# Altium PCB AES17Filter.PcbDoc
Units mm, origin at the board's own origin, x right, y up, seen from the top; angles counter-clockwise.
Board outline 130.75 x 56 mm, 2 copper layers (Top, Bottom), stack 1.53 mm thick; 80 components, 61 nets, 168 pads, 0 vias.
Unrouted connection lines stored in the file: 104.
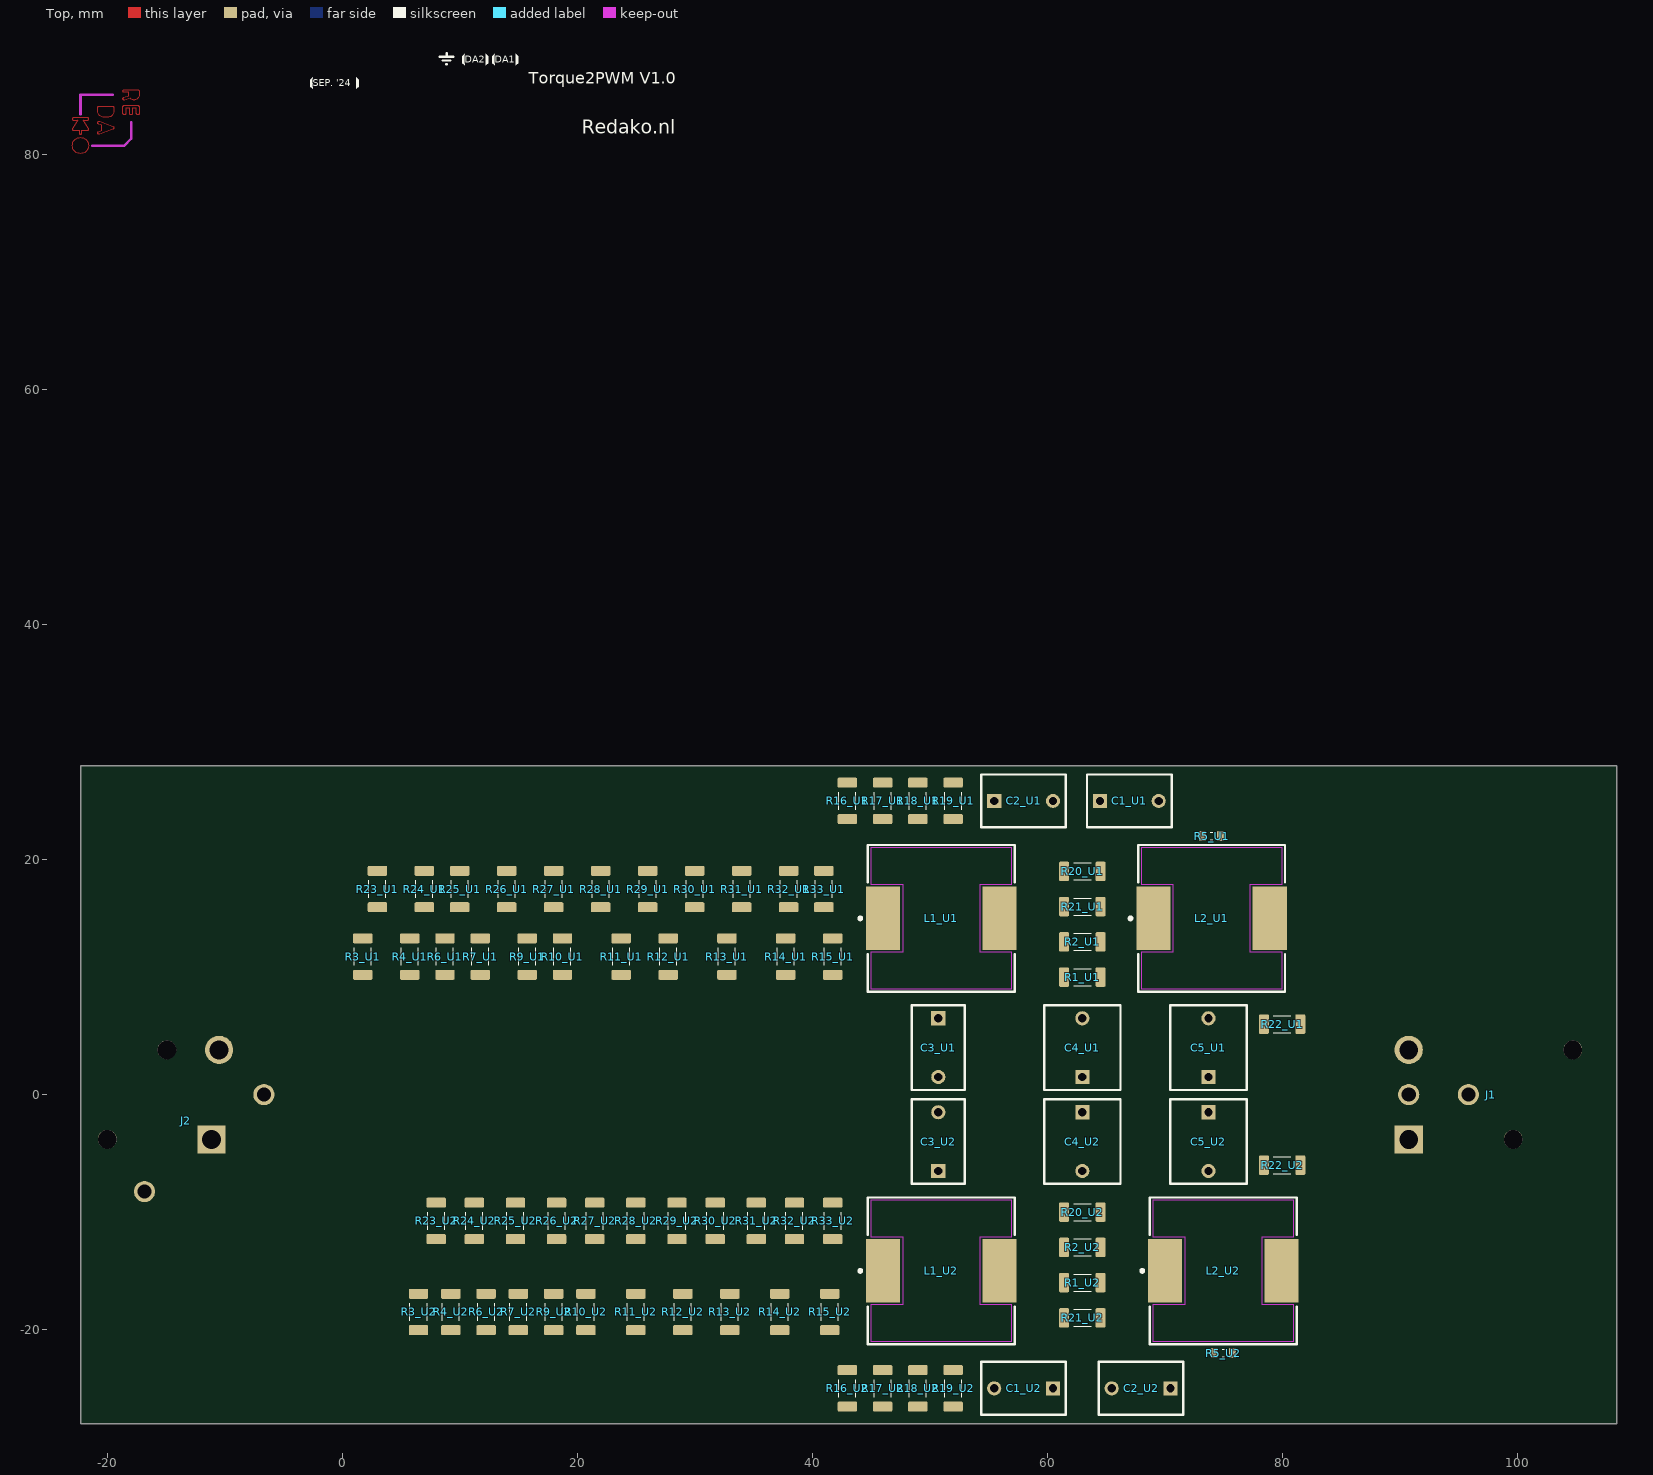
[diagram p0: Top view]
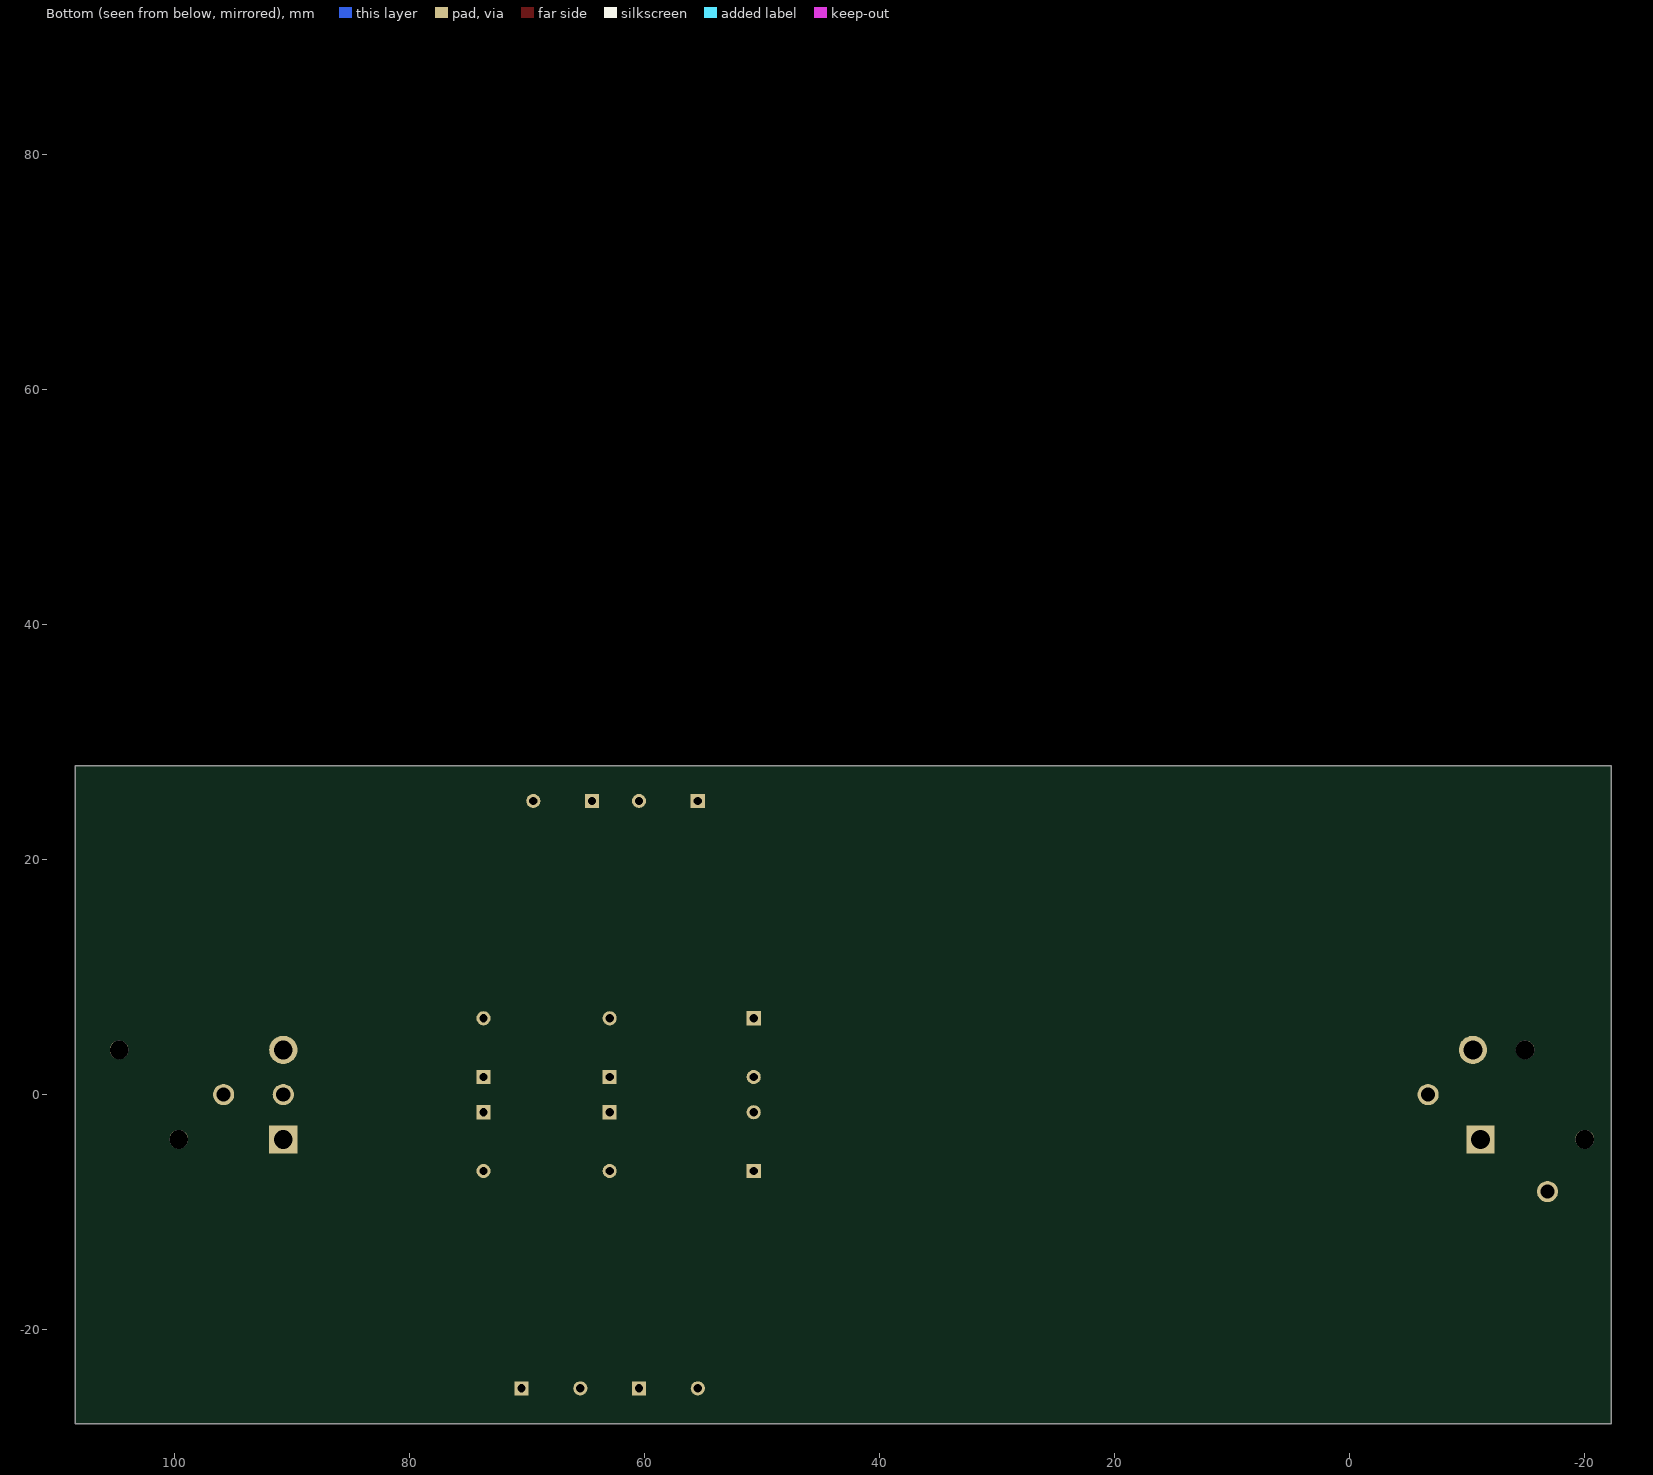
[diagram p1: Bottom view, seen from below]

## Layer stack, top to bottom
Top Solder: solder mask 0.01, Solder Resist, Dk 3.5
Top: signal copper 0.035
Dielectric 1: core 1.46, FR-4, Dk 4.8
Bottom: signal copper 0.035
Bottom Solder: solder mask 0.01, Solder Resist, Dk 3.5

## Board outline
-22.25,-28 108.5,-28 108.5,28 -22.25,28

## Design rules (kind name [scope] priority, off if disabled: settings)
BoardOutlineClearance mdCopperDimension [All] p1: gap=0.25 ignorepadtopadclearanceinfootprint=FALSE
Clearance [All] p1: gap=0.125 ignorepadtopadclearanceinfootprint=FALSE
ComponentClearance [All] p1: gap=0 collisioncheckmode=3 verticalgap=0 showdistances=FALSE
DiffPairsRouting [All] p1: maxlimit=0.127 minlimit=0.125 mostfreqgap=0.127 toplayer_maxgap=0.125 toplayer_prefgap=0.125 toplayer_minwidth=0.399 toplayer_maxwidth=0.399 toplayer_prefwidth=0.399 bottomlayer_mingap=0.127 bottomlayer_minwidth=0.406 bottomlayer_maxwidth=0.406 bottomlayer_prefwidth=0.406 impedanceprofiledriven=TRUE impedanceprofileid={3314250E-EA92-4780-AD0B-8EA7877EF3D0} impedanceprofilevalue=90.000000 maxuncoupledlength=12.7
HoleSize [All] p1: absolutevalues=TRUE maxlimit=2540 minlimit=0.25 maxpercent=80.000 minpercent=20.000
HoleToHoleClearance mdDrill [All] p1: gap=0.203 allowstackedmicrovias=TRUE
MinimumSolderMaskSliver [All] p1 off: minsoldermaskwidth=0.254
PasteMaskExpansion Expansion_SMDPaste_OFF [InPadClass('SMDPaste_OFF')] p1: expansion=0
PasteMaskExpansion mlMinCreamFrame [All] p2: expansion=0
PlaneClearance [All] p1: clearance=0.25
PolygonConnect [All] p1: thpad.connectstyle=Relief thpad.reliefconductorwidth=0.254 thpad.reliefentries=4 thpad.polygonreliefangle="90 Angle" thpad.airgapwidth=0.254 smdpad.connectstyle=Direct smdpad.reliefconductorwidth=0.254 smdpad.reliefentries=4 smdpad.polygonreliefangle="90 Angle" smdpad.airgapwidth=0.254 via.connectstyle=Direct via.reliefconductorwidth=0.254 via.reliefentries=4 via.polygonreliefangle="90 Angle" via.airgapwidth=0.254
RoutingVias [All] p1: holewidth=0.3 width=0.6 viastyle="Through Hole" minholewidth=0.25 minwidth=0.6 maxholewidth=2.54 maxwidth=2.54
SilkToSilkClearance [All] p1: silktosilkclearance=0
SilkToSolderMaskClearance [IsPad] p1: minsilkscreentomaskgap=0 clearancetoexposedcopper=TRUE
SolderMaskExpansion [isVia] p1: expansion=0.102 istentingtop=TRUE
SolderMaskExpansion mlMinStopFrame [All] p2: expansion=0 istentingtop=FALSE
Width "Width_For_NetClass_analog signal" [InNetClass('analog signal')] p1: maxlimit=0.762 minlimit=0.191 preferedwidth=0.508
Width "Width_For_NetClass_digital signal" [InNetClass('digital signal')] p2: maxlimit=0.762 minlimit=0.191 preferedwidth=0.508 minimp=50.000000 maximp=50.000000 favimp=50.000000
Width Width_For_NetClass_power [InNetClass('power')] p3: maxlimit=0.61 minlimit=0.254 preferedwidth=0.3 minimp=50.000000 maximp=50.000000 favimp=50.000000
Width [All] p4: maxlimit=254 minlimit=0.125 preferedwidth=0.2 minimp=50.000000 maximp=50.000000 favimp=50.000000
21 further rules are at their usual default settings.

## Classes and differential pairs
component class AES17Filter: J1 J2
channel class "Single Side Filter": U1 U2
component class U2: C1_U2 C2_U2 C3_U2 C4_U2 C5_U2 L1_U2 L2_U2 R1_U2 R2_U2 R3_U2 R4_U2 R5_U2 R6_U2 R7_U2 R9_U2 R10_U2 R11_U2 R12_U2 R13_U2 R14_U2 R15_U2 R16_U2 R17_U2 R18_U2 R19_U2 R20_U2 R21_U2 R22_U2 R23_U2 R24_U2 R25_U2 R26_U2 R27_U2 R28_U2 R29_U2 R30_U2 R31_U2 R32_U2 R33_U2
component class U1: C1_U1 C2_U1 C3_U1 C4_U1 C5_U1 L1_U1 L2_U1 R1_U1 R2_U1 R3_U1 R4_U1 R5_U1 R6_U1 R7_U1 R9_U1 R10_U1 R11_U1 R12_U1 R13_U1 R14_U1 R15_U1 R16_U1 R17_U1 R18_U1 R19_U1 R20_U1 R21_U1 R22_U1 R23_U1 R24_U1 R25_U1 R26_U1 R27_U1 R28_U1 R29_U1 R30_U1 R31_U1 R32_U1 R33_U1

## Components (designator, comment, footprint, x,y, rotation, side; value= is the part's Value field where it differs from the comment)
C1_U1 "" "Film Capacitor 7.2 x 4.5 x 6.0 mm" 67,25 r0 top value="470pF 250V" (schematic designator C1)
C1_U2 "" "Film Capacitor 7.2 x 4.5 x 6.0 mm" 58,-25 r180 top value="470pF 250V" (schematic designator C1)
C2_U1 "" "Film Capacitor 7.2 x 4.5 x 6.0 mm" 58,25 r0 top value="470pF 250V" (schematic designator C2)
C2_U2 "" "Film Capacitor 7.2 x 4.5 x 6.0 mm" 68,-25 r180 top value="470pF 250V" (schematic designator C2)
C3_U1 "" "Film Capacitor 7.2 x 4.5 x 6.0 mm" 50.738,4 r270 top value="470pF 250V" (schematic designator C3)
C3_U2 "" "Film Capacitor 7.2 x 4.5 x 6.0 mm" 50.738,-4 r90 top value="470pF 250V" (schematic designator C3)
C4_U1 "" "Film Capacitor 7.2 x 6.5 x 8.0 mm" 63,4 r90 top value="4700pF 250V" (schematic designator C4)
C4_U2 "" "Film Capacitor 7.2 x 6.5 x 8.0 mm" 63,-4 r270 top value="4700pF 250V" (schematic designator C4)
C5_U1 "" "Film Capacitor 7.2 x 6.5 x 8.0 mm" 73.738,4 r90 top value="4700pF 250V" (schematic designator C5)
C5_U2 "" "Film Capacitor 7.2 x 6.5 x 8.0 mm" 73.738,-4 r270 top value="4700pF 250V" (schematic designator C5)
J1 "NC3MAAH" NEUTRIK_NC3MAAH 108.56,0 r90 top
J2 "NC3FAAH2" NEUTRIK_NC3FAAH2 -23.81,0 r90 top
L1_U1 "7687709102" "WE-PD HV_1210" 51,15 r270 top (schematic designator L1)
L1_U2 "7687709102" "WE-PD HV_1210" 51,-15 r270 top (schematic designator L1)
L2_U1 "7687709102" "WE-PD HV_1210" 74,15 r270 top (schematic designator L2)
L2_U2 "7687709102" "WE-PD HV_1210" 75,-15 r270 top (schematic designator L2)
R1_U1 "" RESC3216X06N 63,10 r0 top value=300Ω (schematic designator R1)
R1_U2 "" RESC3216X06N 63,-16 r0 top value=300Ω (schematic designator R1)
R2_U1 "" RESC3216X06N 63,13 r0 top value=300Ω (schematic designator R2)
R2_U2 "" RESC3216X06N 63,-13 r0 top value=300Ω (schematic designator R2)
R3_U1 "" RESC3216X06N 1.75,11.75 r90 top value=100Ω (schematic designator R3)
R3_U2 "" RESC3216X06N 6.499,-18.5 r90 top value=100Ω (schematic designator R3)
R4_U1 "" RESC3216X06N 5.75,11.75 r90 top value=100Ω (schematic designator R4)
R4_U2 "" RESC3216X06N 9.249,-18.5 r90 top value=100Ω (schematic designator R4)
R5_U1 "" RESC1608X04N 74,22 r0 top value=3.3kΩ (schematic designator R5)
R5_U2 "" RESC1608X04N 75,-22 r0 top value=3.3kΩ (schematic designator R5)
R6_U1 "" RESC3216X06N 8.75,11.75 r90 top value=100Ω (schematic designator R6)
R6_U2 "" RESC3216X06N 12.249,-18.5 r90 top value=100Ω (schematic designator R6)
R7_U1 "" RESC3216X06N 11.75,11.75 r90 top value=100Ω (schematic designator R7)
R7_U2 "" RESC3216X06N 14.999,-18.5 r90 top value=100Ω (schematic designator R7)
R9_U1 "" RESC3216X06N 15.75,11.75 r90 top value=100Ω (schematic designator R9)
R9_U2 "" RESC3216X06N 17.999,-18.5 r90 top value=100Ω (schematic designator R9)
R10_U1 "" RESC3216X06N 18.75,11.75 r90 top value=100Ω (schematic designator R10)
R10_U2 "" RESC3216X06N 20.749,-18.5 r90 top value=100Ω (schematic designator R10)
R11_U1 "" RESC3216X06N 23.75,11.75 r90 top value=100Ω (schematic designator R11)
R11_U2 "" RESC3216X06N 24.999,-18.5 r90 top value=100Ω (schematic designator R11)
R12_U1 "" RESC3216X06N 27.75,11.75 r90 top value=100Ω (schematic designator R12)
R12_U2 "" RESC3216X06N 28.999,-18.5 r90 top value=100Ω (schematic designator R12)
R13_U1 "" RESC3216X06N 32.75,11.75 r90 top value=100Ω (schematic designator R13)
R13_U2 "" RESC3216X06N 32.999,-18.5 r90 top value=100Ω (schematic designator R13)
R14_U1 "" RESC3216X06N 37.75,11.75 r90 top value=100Ω (schematic designator R14)
R14_U2 "" RESC3216X06N 37.249,-18.5 r90 top value=100Ω (schematic designator R14)
R15_U1 "" RESC3216X06N 41.75,11.75 r90 top value=10Ω (schematic designator R15)
R15_U2 "" RESC3216X06N 41.499,-18.5 r90 top value=10Ω (schematic designator R15)
R16_U1 "" RESC3216X06N 43,25 r90 top value=100Ω (schematic designator R16)
R16_U2 "" RESC3216X06N 43,-25 r90 top value=100Ω (schematic designator R16)
R17_U1 "" RESC3216X06N 46,25 r90 top value=100Ω (schematic designator R17)
R17_U2 "" RESC3216X06N 46,-25 r90 top value=100Ω (schematic designator R17)
R18_U1 "" RESC3216X06N 49,25 r90 top value=100Ω (schematic designator R18)
R18_U2 "" RESC3216X06N 49,-25 r90 top value=100Ω (schematic designator R18)
R19_U1 "" RESC3216X06N 52,25 r90 top value=10Ω (schematic designator R19)
R19_U2 "" RESC3216X06N 52,-25 r90 top value=10Ω (schematic designator R19)
R20_U1 "" RESC3216X06N 63,19 r0 top value=300Ω (schematic designator R20)
R20_U2 "" RESC3216X06N 63,-10 r0 top value=300Ω (schematic designator R20)
R21_U1 "" RESC3216X06N 63,16 r0 top value=300Ω (schematic designator R21)
R21_U2 "" RESC3216X06N 63,-19 r0 top value=300Ω (schematic designator R21)
R22_U1 "" RESC3216X06N 80,6 r0 top value=22Ω (schematic designator R22)
R22_U2 "" RESC3216X06N 80,-6 r0 top value=22Ω (schematic designator R22)
R23_U1 "" RESC3216X06N 3,17.5 r90 top value=100Ω (schematic designator R23)
R23_U2 "" RESC3216X06N 7.999,-10.75 r90 top value=100Ω (schematic designator R23)
R24_U1 "" RESC3216X06N 7,17.5 r90 top value=100Ω (schematic designator R24)
R24_U2 "" RESC3216X06N 11.249,-10.75 r90 top value=100Ω (schematic designator R24)
R25_U1 "" RESC3216X06N 10,17.5 r90 top value=100Ω (schematic designator R25)
R25_U2 "" RESC3216X06N 14.749,-10.75 r90 top value=100Ω (schematic designator R25)
R26_U1 "" RESC3216X06N 14,17.5 r90 top value=100Ω (schematic designator R26)
R26_U2 "" RESC3216X06N 18.249,-10.75 r90 top value=100Ω (schematic designator R26)
R27_U1 "" RESC3216X06N 18,17.5 r90 top value=100Ω (schematic designator R27)
R27_U2 "" RESC3216X06N 21.499,-10.75 r90 top value=100Ω (schematic designator R27)
R28_U1 "" RESC3216X06N 22,17.5 r90 top value=100Ω (schematic designator R28)
R28_U2 "" RESC3216X06N 24.999,-10.75 r90 top value=100Ω (schematic designator R28)
R29_U1 "" RESC3216X06N 26,17.5 r90 top value=100Ω (schematic designator R29)
R29_U2 "" RESC3216X06N 28.499,-10.75 r90 top value=100Ω (schematic designator R29)
R30_U1 "" RESC3216X06N 30,17.5 r90 top value=100Ω (schematic designator R30)
R30_U2 "" RESC3216X06N 31.749,-10.75 r90 top value=100Ω (schematic designator R30)
R31_U1 "" RESC3216X06N 34,17.5 r90 top value=100Ω (schematic designator R31)
R31_U2 "" RESC3216X06N 35.249,-10.75 r90 top value=100Ω (schematic designator R31)
R32_U1 "" RESC3216X06N 38,17.5 r90 top value=100Ω (schematic designator R32)
R32_U2 "" RESC3216X06N 38.499,-10.75 r90 top value=100Ω (schematic designator R32)
R33_U1 "" RESC3216X06N 41,17.5 r90 top value=10Ω (schematic designator R33)
R33_U2 "" RESC3216X06N 41.749,-10.75 r90 top value=10Ω (schematic designator R33)

## Footprints (in the part's own frame and the unit in brackets; to place one, negate y for a bottom-side part, rotate by r counter-clockwise, add the part's x,y. Pads: shape width x height; smd on the part's side, far side on the other; paste and mask are expansions set on the pad)
"Film Capacitor 7.2 x 4.5 x 6.0 mm" [mm]
  rect 1.2x1.2 hole 0.7 paste-1000 mask+0: 1(-2.5,0)
  round 1.2 hole 0.7 paste-1000 mask+0: 2(2.5,0)
  silkscreen extent -3.6,-2.25 3.6,2.25, body extent -3.6,-2.25 3.6,2.25, height 6
"Film Capacitor 7.2 x 6.5 x 8.0 mm" [mm]
  rect 1.2x1.2 hole 0.7 paste-1000 mask+0: 1(-2.5,0)
  round 1.2 hole 0.7 paste-1000 mask+0: 2(2.5,0)
  silkscreen extent -3.6,-3.25 3.6,3.25, body extent -3.6,-3.25 3.6,3.25, height 8
NEUTRIK_NC3FAAH2 [mm]
  rect 2.4x2.4 / inner round 2.4 / far side rect 2.4x2.4 hole 1.6: 1(-3.81,-12.7)
  round 2.4 hole 1.6: 2(3.81,-13.335)
  round 1.8 hole 1.2: 3(0,-17.145) G(-8.255,-6.985)
  round 1.6 hole 1.6 unplated: ""(-3.81,-3.81) ""(3.81,-8.89)
  body extent -12.5,-19.5 12.5,6.8, height 29.03
NEUTRIK_NC3MAAH [mm]
  rect 2.4x2.4 / inner round 2.4 / far side rect 2.4x2.4 hole 1.6: 1(-3.81,17.78)
  round 2.4 hole 1.6: 2(3.81,17.78)
  round 1.8 hole 1.2: 3(0,17.78) G(0,12.7)
  round 1.6 hole 1.6 unplated: ""(-3.81,8.89) ""(3.81,3.81)
  body extent -12.8,-2.7 12.5,19, height 25.29
RESC1608X04N [mm] "0603 Chip Resistor, 2-Leads, Body 1.60x0.80mm, IPC Medium Density"
  rrect25% 0.6x0.85 smd: 1(-0.775,0) 2(0.775,0)
  silkscreen extent -0.1,-0.33 0.1,0.33, body extent -0.8,-0.4 0.8,0.4, height 0.45
RESC3216X06N [mm] "Chip Resistor, 2-Leads, Body 3.20x1.60mm, IPC Medium Density"
  rrect25% 0.85x1.65 smd: 1(-1.55,0) 2(1.55,0)
  silkscreen extent -0.75,-0.72 0.75,0.72, body extent -1.6,-0.8 1.6,0.8, height 0.55
"WE-PD HV_1210" [mm] "SMT High Voltage Power Inductor, 2-Leads, body 12.00x12.00mm"
  rect 5.4x2.9 smd: 1(0,-4.95) 2(0,4.95)
  Top keep-out region: -6,6 -6,-6 -2.9,-6 -2.9,-3.3 2.9,-3.3 2.9,-6 6,-6 6,6 2.9,6 2.9,3.3 -2.9,3.3 -2.9,6
  silkscreen extent -6.25,-7.02 6.25,6.25, body extent -6,-6 6,6, height 9.7

## Part data
C1_U1 C1_U2 C2_U1 C2_U2 C3_U1 C3_U2: "PFR5102F100J11L4BULK Cap Film 0.001uF 100V PP 1% (7.2 X 4.5 X 6mm) Radial 5mm 100C Bulk", MPN=FKP2F004701D00HA00
C4_U1 C4_U2 C5_U1 C5_U2: "PFR5102F100J11L4BULK Cap Film 0.001uF 100V PP 1% (7.2 X 4.5 X 6mm) Radial 5mm 100C Bulk", MPN=FKP2F014701I00JA00
J1: "3 pole male XLR receptacle, grounding: separate ground contact to mating connector shell and front panel, horizontal PCB mount", Package=None, Availability="In Stock", Check_prices=https://www.snapeda.com/parts/NC3MAAH/Neutrik/view-part/?ref=eda, MF=Neutrik, MP=NC3MAAH, Price=None, Purchase-URL=https://pricing.snapeda.com/search/part/NC3MAAH/?ref=eda, SnapEDA_Link=https://www.snapeda.com/parts/NC3MAAH/Neutrik/view-part/?ref=snap
J2: "3 pole female XLR receptacle, grounding: separate ground contact to mating connector shell and front panel, horizontal PCB mount", Package=None, Check_prices=https://www.snapeda.com/parts/NC3FAAH2/Neutrik/view-part/?ref=eda, MF=Neutrik, MP=NC3FAAH2, SnapEDA_Link=https://www.snapeda.com/parts/NC3FAAH2/Neutrik/view-part/?ref=snap
L1_U1 L1_U2 L2_U1 L2_U2: library part CMP-1387-00011-6, Ambient Temperature Range High=85°C, Ambient Temperature Range Low=-40°C, Case/Package=Nonstandard, Current Rating=720mA, DC Resistance (DCR)=1.2Ω, Inductance=1mH, Inductance Tolerance=20%, Max Operating Temperature=125°C, Saturation Current=900mA, Self Resonant Frequency=1.2MHz, Test Frequency=100kHz, Composition=Wirewound, Depth=12mm, Height=10.5mm, Height - Seated (Max)=10.4902mm, Length=12mm, Max DC Current=720mA, Min Operating Temperature=-40°C, Mount="Surface Mount", NexarPartId=29613322, Packaging=Digi-Reel®, REACH SVHC=Unknown, RMS Current (Irms)=720mA, RoHS=Compliant, Series Resistance=1.2Ω, Shielding=Shielded, Termination=SMD/SMT, Tolerance=20%, Width=12mm
R1_U1 R1_U2 R2_U1 R2_U2 R20_U1 R20_U2 R21_U1 R21_U2 R22_U1 R22_U2: library part Res, Package=1206
R3_U1 R3_U2 R4_U1 R4_U2 R6_U1 R6_U2 R7_U1 R7_U2 R9_U1 R9_U2 R10_U1 R10_U2 R11_U1 R11_U2 R12_U1 R12_U2 R13_U1 R13_U2 R14_U1 R14_U2 R16_U1 R16_U2 R17_U1 R17_U2 R18_U1 R18_U2 R23_U1 R23_U2 R24_U1 R24_U2 R25_U1 R25_U2 R26_U1 R26_U2 R27_U1 R27_U2 R28_U1 R28_U2 R29_U1 R29_U2 R30_U1 R30_U2 R31_U1 R31_U2 R32_U1 R32_U2: library part Res, MPN=1206W4F1000T5E, Package=1206
R5_U1 R5_U2: library part Res, Package=0603
R15_U1 R15_U2 R19_U1 R19_U2 R33_U1 R33_U2: library part Res, MPN=1206W4F100JT5E, Package=1206

## Nets (pads, with @x,y where several pads share a name; then routed paths per layer and width w, separated by ;. In a path a pad name is that pad's centre, name@x,y a point inside that pad or via, vN(x,y) a via of type N, cw(c..) or ccw(c..) an arc to the next point about the centre after c; other vN are vias at no path point)
GND: C3_U1.2 C3_U2.2 C4_U1.1 C4_U2.1 C5_U1.1 C5_U2.1 J1.1 J1.G J2.1 J2.G
NetC1_U1_1: C1_U1.1 C2_U1.2 C4_U1.2 L1_U1.2 R1_U1.1 R2_U1.1 R20_U1.1 R21_U1.1
NetC1_U1_2: C1_U1.2 C2_U1.1 R19_U1.2
NetC1_U2_1: C1_U2.1 C2_U2.2 C4_U2.2 L1_U2.2 R1_U2.1 R2_U2.1 R20_U2.1 R21_U2.1
NetC1_U2_2: C1_U2.2 C2_U2.1 R19_U2.2
NetC3_U1_1: C3_U1.1 L1_U1.1 R15_U1.2 R16_U1.1 R33_U1.2
NetC3_U2_1: C3_U2.1 L1_U2.1 R15_U2.2 R16_U2.1 R33_U2.2
NetC5_U1_2: C5_U1.2 L2_U1.2 R5_U1.2 R22_U1.1
NetC5_U2_2: C5_U2.2 L2_U2.2 R5_U2.2 R22_U2.1
NetJ1_2: J1.2 R22_U1.2
NetJ1_3: J1.3 R22_U2.2
NetJ2_2: J2.2 R3_U1.1 R23_U1.1
NetJ2_3: J2.3 R3_U2.1 R23_U2.1
NetL2_U1_1: L2_U1.1 R1_U1.2 R2_U1.2 R5_U1.1 R20_U1.2 R21_U1.2
NetL2_U2_1: L2_U2.1 R1_U2.2 R2_U2.2 R5_U2.1 R20_U2.2 R21_U2.2
NetR3_U1_2: R3_U1.2 R4_U1.1
NetR3_U2_2: R3_U2.2 R4_U2.1
NetR4_U1_2: R4_U1.2 R6_U1.1
NetR4_U2_2: R4_U2.2 R6_U2.1
NetR6_U1_2: R6_U1.2 R7_U1.1
NetR6_U2_2: R6_U2.2 R7_U2.1
NetR7_U1_2: R7_U1.2 R9_U1.1
NetR7_U2_2: R7_U2.2 R9_U2.1
NetR9_U1_2: R9_U1.2 R10_U1.1
NetR9_U2_2: R9_U2.2 R10_U2.1
NetR10_U1_2: R10_U1.2 R11_U1.1
NetR10_U2_2: R10_U2.2 R11_U2.1
NetR11_U1_2: R11_U1.2 R12_U1.1
NetR11_U2_2: R11_U2.2 R12_U2.1
NetR12_U1_2: R12_U1.2 R13_U1.1
NetR12_U2_2: R12_U2.2 R13_U2.1
NetR13_U1_2: R13_U1.2 R14_U1.1
NetR13_U2_2: R13_U2.2 R14_U2.1
NetR14_U1_2: R14_U1.2 R15_U1.1
NetR14_U2_2: R14_U2.2 R15_U2.1
NetR16_U1_2: R16_U1.2 R17_U1.1
NetR16_U2_2: R16_U2.2 R17_U2.1
NetR17_U1_2: R17_U1.2 R18_U1.1
NetR17_U2_2: R17_U2.2 R18_U2.1
NetR18_U1_2: R18_U1.2 R19_U1.1
NetR18_U2_2: R18_U2.2 R19_U2.1
NetR23_U1_2: R23_U1.2 R24_U1.1
NetR23_U2_2: R23_U2.2 R24_U2.1
NetR24_U1_2: R24_U1.2 R25_U1.1
NetR24_U2_2: R24_U2.2 R25_U2.1
NetR25_U1_2: R25_U1.2 R26_U1.1
NetR25_U2_2: R25_U2.2 R26_U2.1
NetR26_U1_2: R26_U1.2 R27_U1.1
NetR26_U2_2: R26_U2.2 R27_U2.1
NetR27_U1_2: R27_U1.2 R28_U1.1
NetR27_U2_2: R27_U2.2 R28_U2.1
NetR28_U1_2: R28_U1.2 R29_U1.1
NetR28_U2_2: R28_U2.2 R29_U2.1
NetR29_U1_2: R29_U1.2 R30_U1.1
NetR29_U2_2: R29_U2.2 R30_U2.1
NetR30_U1_2: R30_U1.2 R31_U1.1
NetR30_U2_2: R30_U2.2 R31_U2.1
NetR31_U1_2: R31_U1.2 R32_U1.1
NetR31_U2_2: R31_U2.2 R32_U2.1
NetR32_U1_2: R32_U1.2 R33_U1.1
NetR32_U2_2: R32_U2.2 R33_U2.1
pads on no net: J1. J2.

## Polygon pours and split planes (outlines as drawn)
no net on Top "NONET_L01_P131" (solid, pour order 131): -22.961,80.785 cw(c-22.27,80.783) -22.272,81.473 cw(c-22.273,80.783) -21.583,80.785 cw(c-22.273,80.786) -22.272,80.096 cw(c-22.27,80.786)
no net on Top "NONET_L01_P127" (solid, pour order 127): -20.786,82.793 cw(c-20.697,82.729) -20.731,82.833 cw(c-20.698,82.723) -20.653,82.829 -19.518,82.403 cw(c-19.544,82.292) -19.43,82.297 -19.43,82.296 -19.43,82.295 cw(c-19.549,82.289) -19.43,82.292 cw(c-19.535,82.29) -19.43,82.289 -19.43,82.287 -19.43,82.286 -19.43,82.285 cw(c-19.453,82.285) -19.43,82.285 cw(c-19.457,82.286) -19.43,82.284 cw(c-19.461,82.286) -19.43,82.283 cw(c-19.468,82.286) -19.43,82.283 -19.43,82.282 -19.43,82.281 -19.43,82.28 -19.43,82.278 -19.43,82.277 -19.431,82.277 cw(c-19.545,82.29) -19.519,82.179 -20.653,81.753 cw(c-20.698,81.852) -20.762,81.765 cw(c-20.685,81.864) -20.81,81.853 cw(c-20.701,81.864) -20.796,81.92 cw(c-20.699,81.859) -20.734,81.968 -20.45,82.075 -20.45,82.507 -20.734,82.614 cw(c-20.702,82.718) -20.808,82.694 cw(c-20.685,82.718)
no net on Top "NONET_L01_P128" (solid, pour order 128): 311 vertices, not listed, extent -20.809,83.18 -19.429,84.129
no net on Top "NONET_L01_P129" (solid, pour order 129): 319 vertices, not listed, extent -18.656,83.394 -17.277,84.2
no net on Top "NONET_L01_P130" (solid, pour order 130): -18.615,85.502 cw(c-18.545,85.412) -18.542,85.526 -17.394,85.526 cw(c-17.392,85.412) -17.277,85.413 -17.278,85.413 -17.278,85.411 -17.278,85.409 -17.278,85.407 -17.278,85.405 -17.278,85.403 cw(c-17.393,85.408) -17.278,85.401 cw(c-17.375,85.407) -17.278,85.399 cw(c-17.362,85.406) -17.279,85.397 cw(c-17.349,85.404) -17.279,85.393 -17.279,85.089 cw(c-17.38,85.089) -17.279,85.084 cw(c-17.718,85.09) -17.717,84.651 cw(c-17.718,84.766) -17.726,84.651 cw(c-17.716,85.089) -18.052,84.808 -18.506,84.657 cw(c-18.547,84.757) -18.615,84.672 cw(c-18.534,84.769) -18.66,84.763 cw(c-18.55,84.77) -18.642,84.829 cw(c-18.548,84.764) -18.578,84.875 -18.149,85.018 cw(c-17.502,85.109) -18.151,85.032 cw(c-17.586,85.099) -18.152,85.046 cw(c-17.65,85.093) -18.153,85.06 cw(c-17.719,85.089) -18.154,85.089 -18.154,85.297 -18.542,85.297 cw(c-18.547,85.406) -18.638,85.346 cw(c-18.531,85.412) -18.652,85.446 cw(c-18.546,85.417)
no net on Top "NONET_L01_P132" (solid, pour order 132): -22.961,83.044 ccw(c-22.838,83.043) -22.942,82.979 ccw(c-22.851,83.038) -22.846,82.929 -22.486,82.929 -22.931,82.263 ccw(c-22.848,82.183) -22.94,82.115 ccw(c-22.847,82.182) -22.829,82.069 -22.387,82.069 -22.387,81.861 ccw(c-22.272,81.855) -22.364,81.786 ccw(c-22.278,81.854) -22.306,81.748 ccw(c-22.272,81.869) -22.206,81.762 ccw(c-22.266,81.853) -22.157,81.861 -22.157,82.069 -21.714,82.069 ccw(c-21.697,82.182) -21.596,82.127 ccw(c-21.699,82.184) -21.582,82.185 ccw(c-21.696,82.183) -21.611,82.26 -22.057,82.929 -21.698,82.929 ccw(c-21.696,83.044) -21.582,83.046 ccw(c-21.696,83.044) -21.698,83.159 -22.846,83.159 ccw(c-22.85,83.049)
no net on Top Solder "NONET_L-01_P-001" (solid): 834 vertices, not listed, extent -12.923,81.905 -6.799,87.955
no net on Top Solder "NONET_L01_P083" (solid): -20.786,82.793 cw(c-20.697,82.729) -20.731,82.833 cw(c-20.698,82.723) -20.653,82.829 -19.518,82.403 cw(c-19.544,82.292) -19.43,82.297 -19.43,82.296 -19.43,82.295 cw(c-19.549,82.289) -19.43,82.292 cw(c-19.535,82.29) -19.43,82.289 -19.43,82.287 -19.43,82.286 -19.43,82.285 cw(c-19.453,82.285) -19.43,82.285 cw(c-19.457,82.286) -19.43,82.284 cw(c-19.461,82.286) -19.43,82.283 cw(c-19.468,82.286) -19.43,82.283 -19.43,82.282 -19.43,82.281 -19.43,82.28 -19.43,82.278 -19.43,82.277 -19.431,82.277 cw(c-19.545,82.29) -19.519,82.179 -20.653,81.753 cw(c-20.698,81.852) -20.762,81.765 cw(c-20.685,81.864) -20.81,81.853 cw(c-20.701,81.864) -20.796,81.92 cw(c-20.699,81.859) -20.734,81.968 -20.45,82.075 -20.45,82.507 -20.734,82.614 cw(c-20.702,82.718) -20.808,82.694 cw(c-20.685,82.718)
no net on Top Solder "NONET_L01_P084" (solid): 311 vertices, not listed, extent -20.809,83.18 -19.429,84.129
no net on Top Solder "NONET_L01_P080" (solid): -22.387,85.066 cw(c-22.274,85.089) -22.354,85.171 cw(c-22.272,85.091) -22.25,85.204 -19.546,85.204 cw(c-19.544,85.089) -19.43,85.09 cw(c-19.544,85.089) -19.546,84.974 -22.157,84.974 -22.157,83.159 -21.698,83.159 cw(c-21.696,83.044) -21.582,83.046 cw(c-21.696,83.044) -21.698,82.929 -22.057,82.929 -21.611,82.26 cw(c-21.696,82.183) -21.582,82.185 cw(c-21.699,82.184) -21.596,82.127 cw(c-21.697,82.182) -21.714,82.069 -22.157,82.069 -22.157,81.861 cw(c-22.266,81.853) -22.206,81.762 cw(c-22.272,81.869) -22.306,81.748 cw(c-22.278,81.854) -22.364,81.786 cw(c-22.272,81.855) -22.387,81.861 -22.387,82.069 -22.829,82.069 cw(c-22.847,82.182) -22.94,82.115 cw(c-22.848,82.183) -22.931,82.263 -22.486,82.929 -22.846,82.929 cw(c-22.851,83.038) -22.942,82.979 cw(c-22.838,83.043) -22.961,83.044 cw(c-22.85,83.049) -22.846,83.159 -22.387,83.159
no net on Top Solder "NONET_L01_P085" (solid): 319 vertices, not listed, extent -18.656,83.394 -17.277,84.2
no net on Top Solder "NONET_L01_P075" (solid): -18.082,82.757 -18.082,81.406 -18.589,80.899 -21.593,80.899 ccw(c-22.274,80.782) -22.272,81.473 ccw(c-22.27,80.783) -22.961,80.785 ccw(c-22.27,80.786) -22.272,80.096 ccw(c-22.274,80.787) -21.593,80.67 -18.556,80.67 ccw(c-18.543,80.784) -18.501,80.677 ccw(c-18.54,80.785) -18.449,80.715 -17.901,81.263 ccw(c-17.967,81.356) -17.859,81.321 ccw(c-17.969,81.36) -17.852,81.36 ccw(c-17.968,81.359) -17.852,81.369 ccw(c-17.956,81.36) -17.853,81.375 -17.853,82.757 ccw(c-17.967,82.763) -17.876,82.832 ccw(c-17.961,82.764) -17.933,82.87 ccw(c-17.967,82.749) -18.034,82.856 ccw(c-17.974,82.765)
no net on Top Solder "NONET_L01_P086" (solid): -18.615,85.502 cw(c-18.545,85.412) -18.542,85.526 -17.394,85.526 cw(c-17.392,85.412) -17.277,85.413 -17.278,85.413 -17.278,85.411 -17.278,85.409 -17.278,85.407 -17.278,85.405 -17.278,85.403 cw(c-17.393,85.408) -17.278,85.401 cw(c-17.375,85.407) -17.278,85.399 cw(c-17.362,85.406) -17.279,85.397 cw(c-17.349,85.404) -17.279,85.393 -17.279,85.089 cw(c-17.38,85.089) -17.279,85.084 cw(c-17.718,85.09) -17.717,84.651 cw(c-17.718,84.766) -17.726,84.651 cw(c-17.716,85.089) -18.052,84.808 -18.506,84.657 cw(c-18.547,84.757) -18.615,84.672 cw(c-18.534,84.769) -18.66,84.763 cw(c-18.55,84.77) -18.642,84.829 cw(c-18.548,84.764) -18.578,84.875 -18.149,85.018 cw(c-17.502,85.109) -18.151,85.032 cw(c-17.586,85.099) -18.152,85.046 cw(c-17.65,85.093) -18.153,85.06 cw(c-17.719,85.089) -18.154,85.089 -18.154,85.297 -18.542,85.297 cw(c-18.547,85.406) -18.638,85.346 cw(c-18.531,85.412) -18.652,85.446 cw(c-18.546,85.417)

## Keep-outs
Top:
  lines w0.217: -22.27,83.435 -22.27,85.09 -22.268,85.089 -19.545,85.089 ; -21.287,80.783 -18.54,80.783 -17.962,81.36 -17.962,82.763

## Other copper
Top:
  pour cut-out: -17.925,85.297 -17.509,85.297 -17.509,85.089 cw(c-17.715,85.087) -17.717,84.881 cw(c-17.718,85.087) -17.891,84.974 -17.895,84.982 -17.898,84.986 -17.9,84.99 cw(c-17.668,85.117) -17.902,84.994 cw(c-17.71,85.094) -17.904,84.998 cw(c-17.735,85.082) -17.906,85.003 cw(c-17.755,85.073) -17.911,85.012 cw(c-17.762,85.07) -17.912,85.017 cw(c-17.695,85.092) -17.923,85.059 cw(c-17.716,85.089) -17.925,85.089
  pour cut-out: -22.272,81.244 cw(c-22.27,80.786) -21.813,80.805 -21.813,80.795 -21.813,80.791 -21.813,80.788 -21.813,80.784 cw(c-22.096,80.784) -21.813,80.777 -21.813,80.774 -21.813,80.769 -21.813,80.765 cw(c-22.27,80.782) -22.272,80.325 cw(c-22.274,80.783) -22.731,80.785 cw(c-22.274,80.786)
  pour cut-out: -20.579,83.898 -20.579,83.725 ccw(c-20.265,83.724) -20.263,83.41 -19.976,83.41 ccw(c-19.975,83.724) -19.661,83.725 -19.661,83.898
  pour cut-out: -20.22,82.421 -19.873,82.291 -20.22,82.161
  pour cut-out: -22.631,82.298 -22.272,82.837 -21.912,82.298

## Silkscreen, mask and mechanical layers (free items; w line width, h text height)
Top Overlay:
  region: 1.202,86.599 1.202,85.599 1.402,85.799 1.402,86.399
  region: -2.498,85.599 -2.498,86.599 -2.698,86.399 -2.698,85.799
  region: 10.42,87.6 10.42,88.6 10.22,88.4 10.22,87.8
  region: 14.77,88.6 14.77,87.6 14.97,87.8 14.97,88.4
  region: 12.22,88.6 12.22,87.6 12.42,87.8 12.42,88.4
  region: 12.97,87.6 12.97,88.6 12.77,88.4 12.77,87.8
  lines w0.203: 8.315,88.333 9.465,88.333 ; 8.572,88.015 9.207,88.015 ; 8.865,87.698 8.915,87.698 ; 8.89,88.333 8.89,88.65
  text "DA2" at 10.42,87.6 h1
  text "DA1" at 12.97,87.6 h1
  text "Torque2PWM V1.0" at 15.871,85.706 h1.7
  text "SEP. '24" at -2.498,85.599 h1
  text "Redako.nl" at 20.4,81.4 h2
Top Solder:
  pour cut-out: -20.579,83.898 -20.579,83.725 ccw(c-20.265,83.724) -20.263,83.41 -19.976,83.41 ccw(c-19.975,83.724) -19.661,83.725 -19.661,83.898
  pour cut-out: -17.925,85.297 -17.509,85.297 -17.509,85.089 cw(c-17.715,85.087) -17.717,84.881 cw(c-17.718,85.087) -17.891,84.974 -17.895,84.982 -17.898,84.986 -17.9,84.99 cw(c-17.668,85.117) -17.902,84.994 cw(c-17.71,85.094) -17.904,84.998 cw(c-17.735,85.082) -17.906,85.003 cw(c-17.755,85.073) -17.911,85.012 cw(c-17.762,85.07) -17.912,85.017 cw(c-17.695,85.092) -17.923,85.059 cw(c-17.716,85.089) -17.925,85.089
  pour cut-out: -22.272,81.244 cw(c-22.27,80.786) -21.813,80.805 -21.813,80.795 -21.813,80.791 -21.813,80.788 -21.813,80.784 cw(c-22.096,80.784) -21.813,80.777 -21.813,80.774 -21.813,80.769 -21.813,80.765 cw(c-22.27,80.782) -22.272,80.325 cw(c-22.274,80.783) -22.731,80.785 cw(c-22.274,80.786)
  pour cut-out: -20.22,82.421 -19.873,82.291 -20.22,82.161
  pour cut-out: -22.631,82.298 -22.272,82.837 -21.912,82.298
Bottom Solder:
  text "A" at 13.2,79.1 h8
Dimension:
  lines w0.2: -33,0 128,0

## Text inside footprints (layer, text, board x,y; h text height)
J2: Top 3D Body "PANEL EDGE" at -24.31,13 h1.27 r90